# Altium PCB GPS_WS_NEO7M.PcbDoc
Units mm, origin at the board's own origin, x right, y up, seen from the top; angles counter-clockwise.
Board outline 40 x 32.5 mm, 4 copper layers (Top Layer, GND, PWR, Bottom Layer), stack 0.66 mm thick; 41 components, 31 nets, 145 pads, 335 vias.
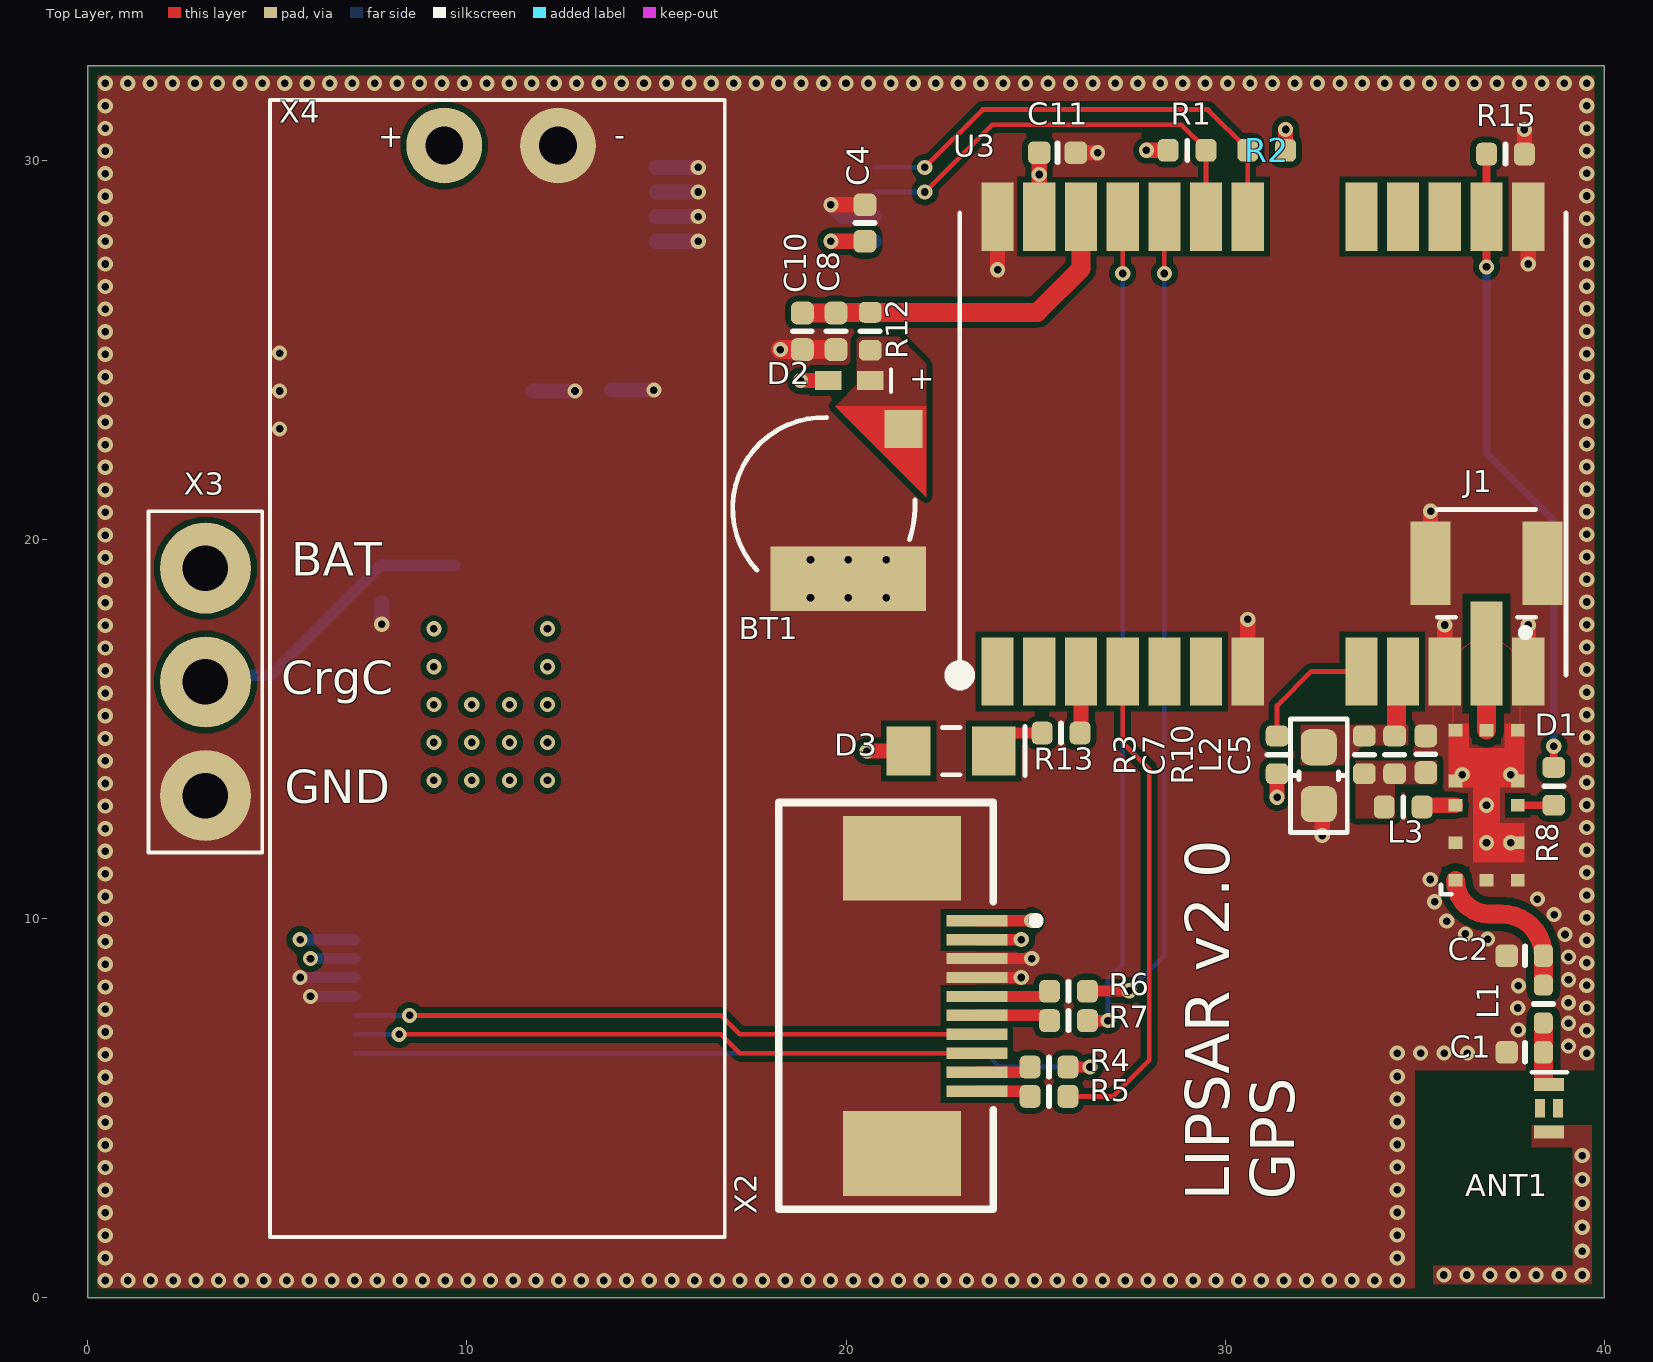
[diagram p0: Top Layer view]
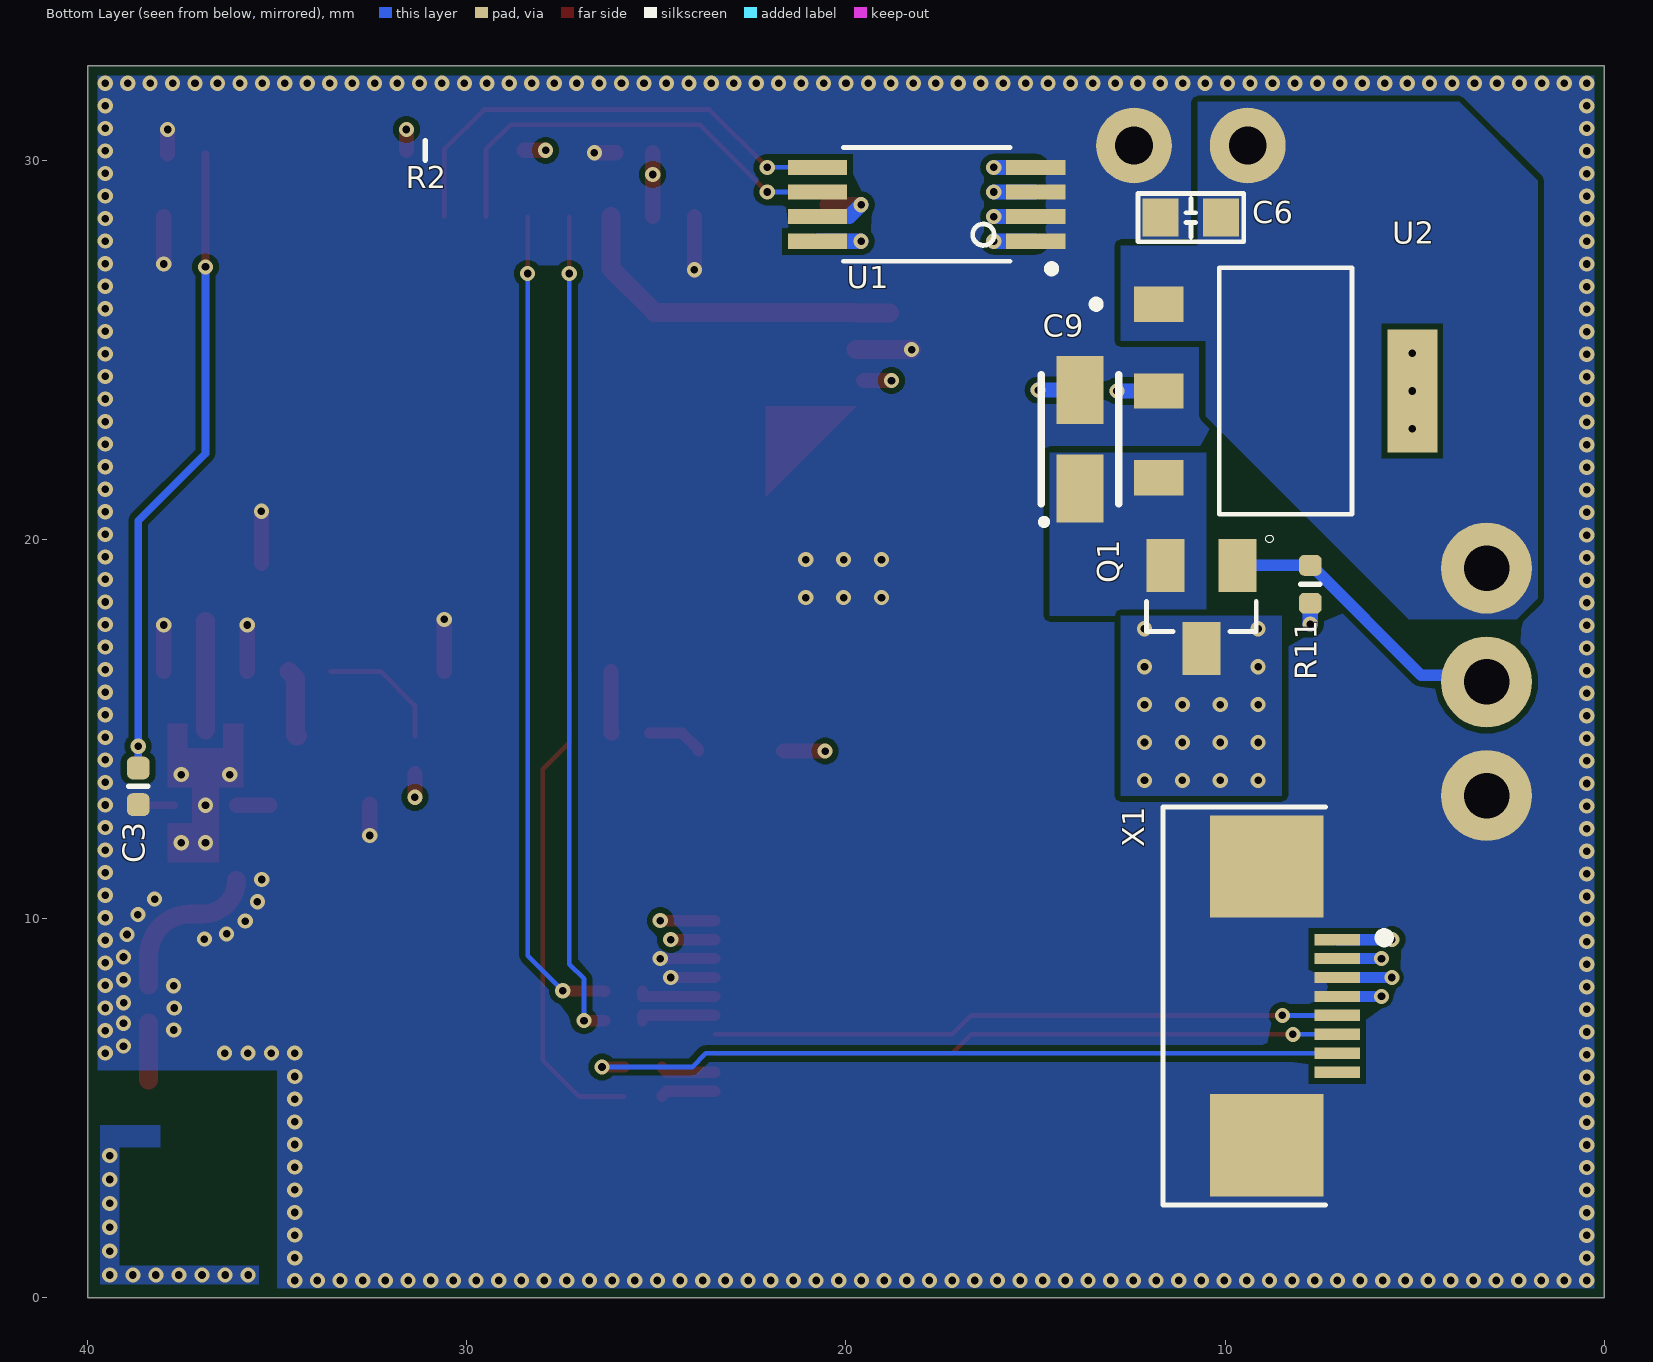
[diagram p1: Bottom Layer view, seen from below]
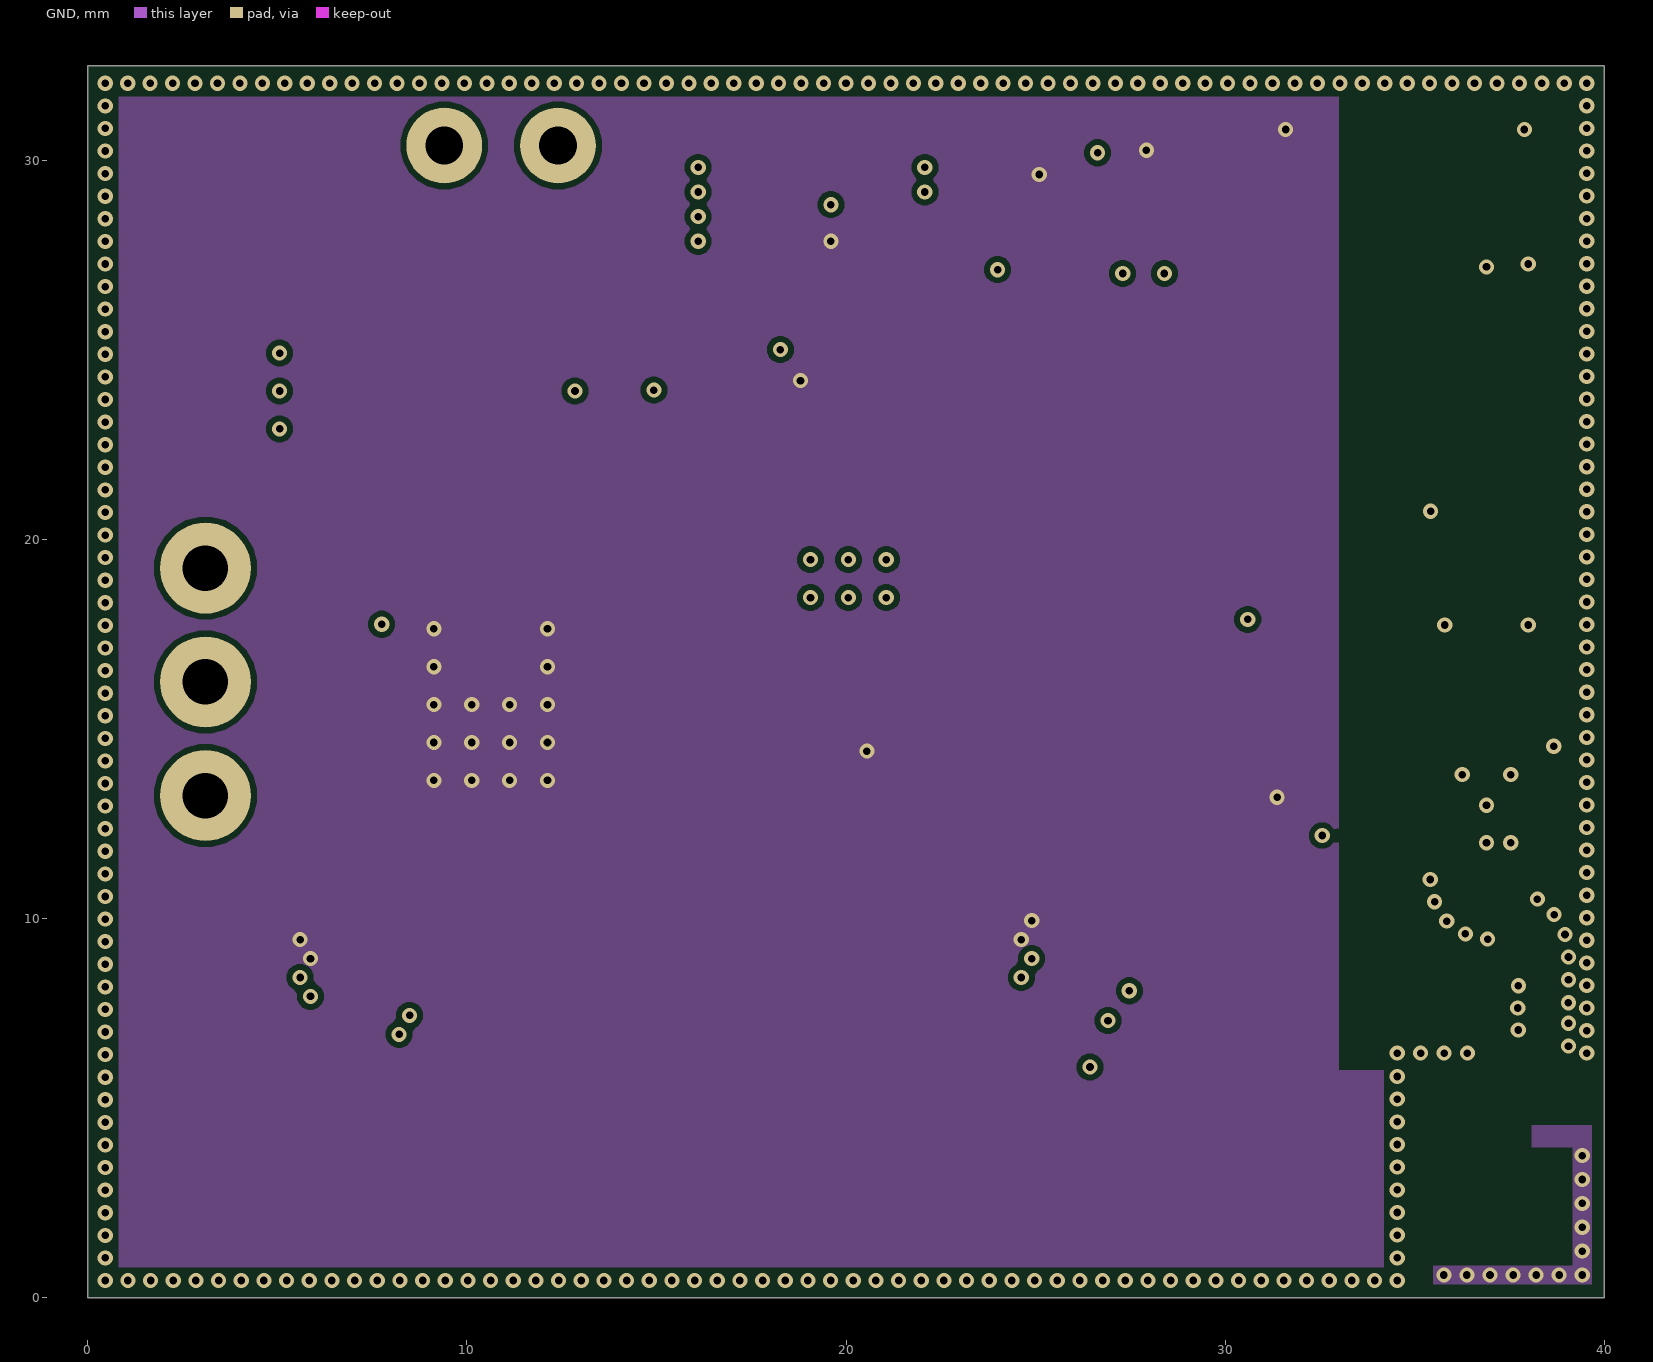
[diagram p2: GND]
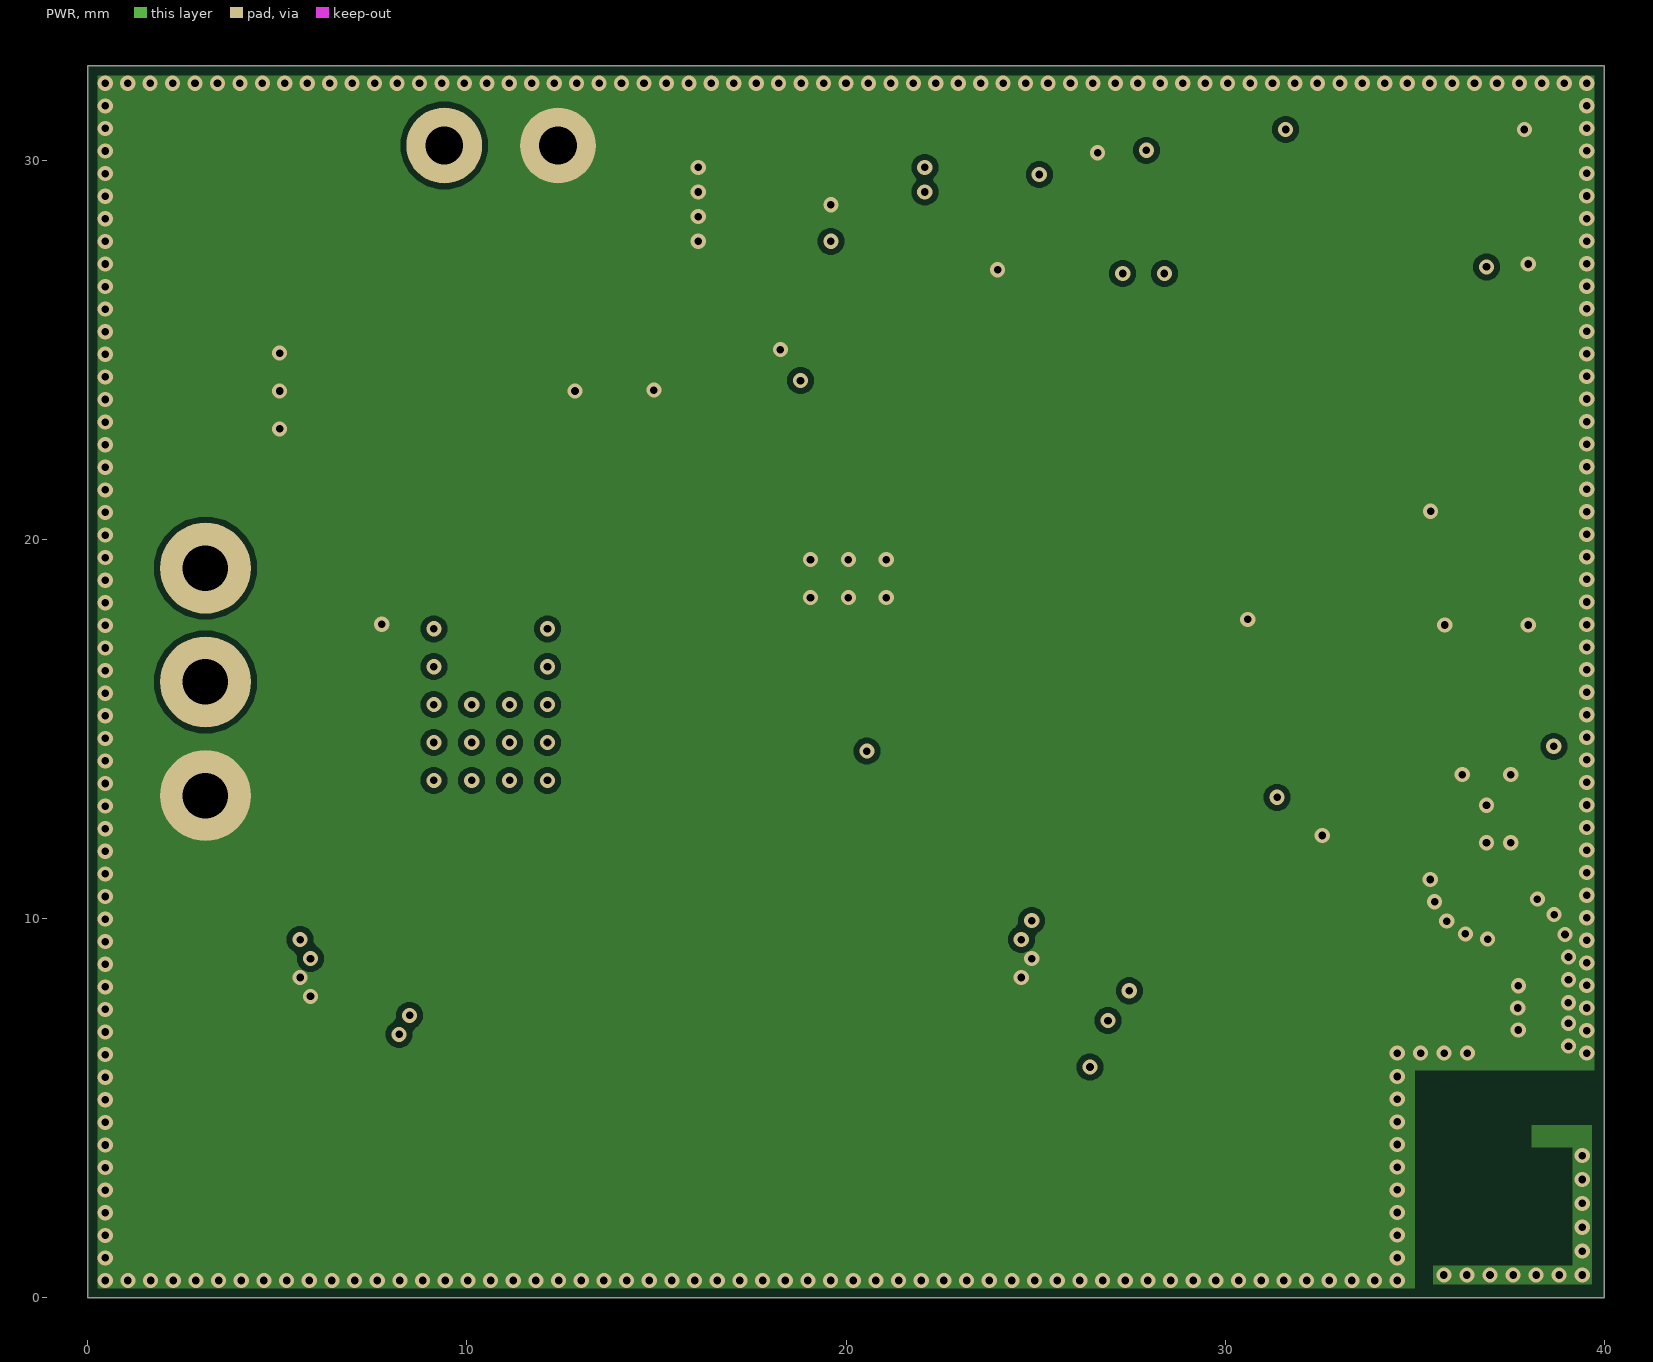
[diagram p3: PWR]
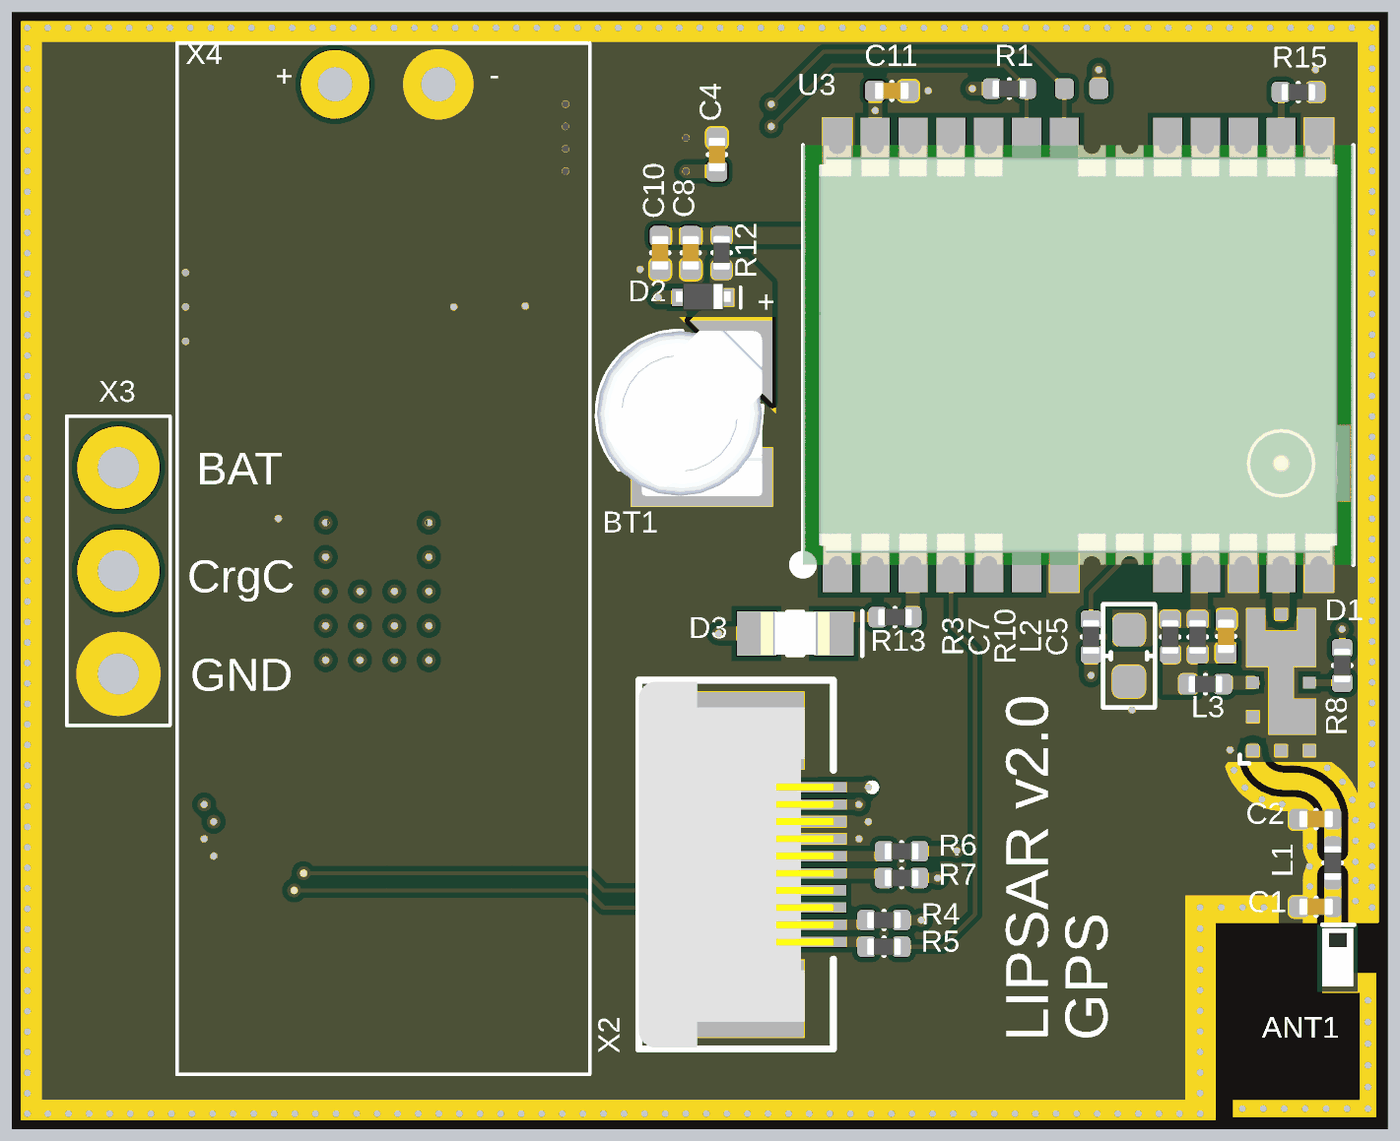
[diagram p4: 3D render of the assembled board from above, using the file's embedded part models]
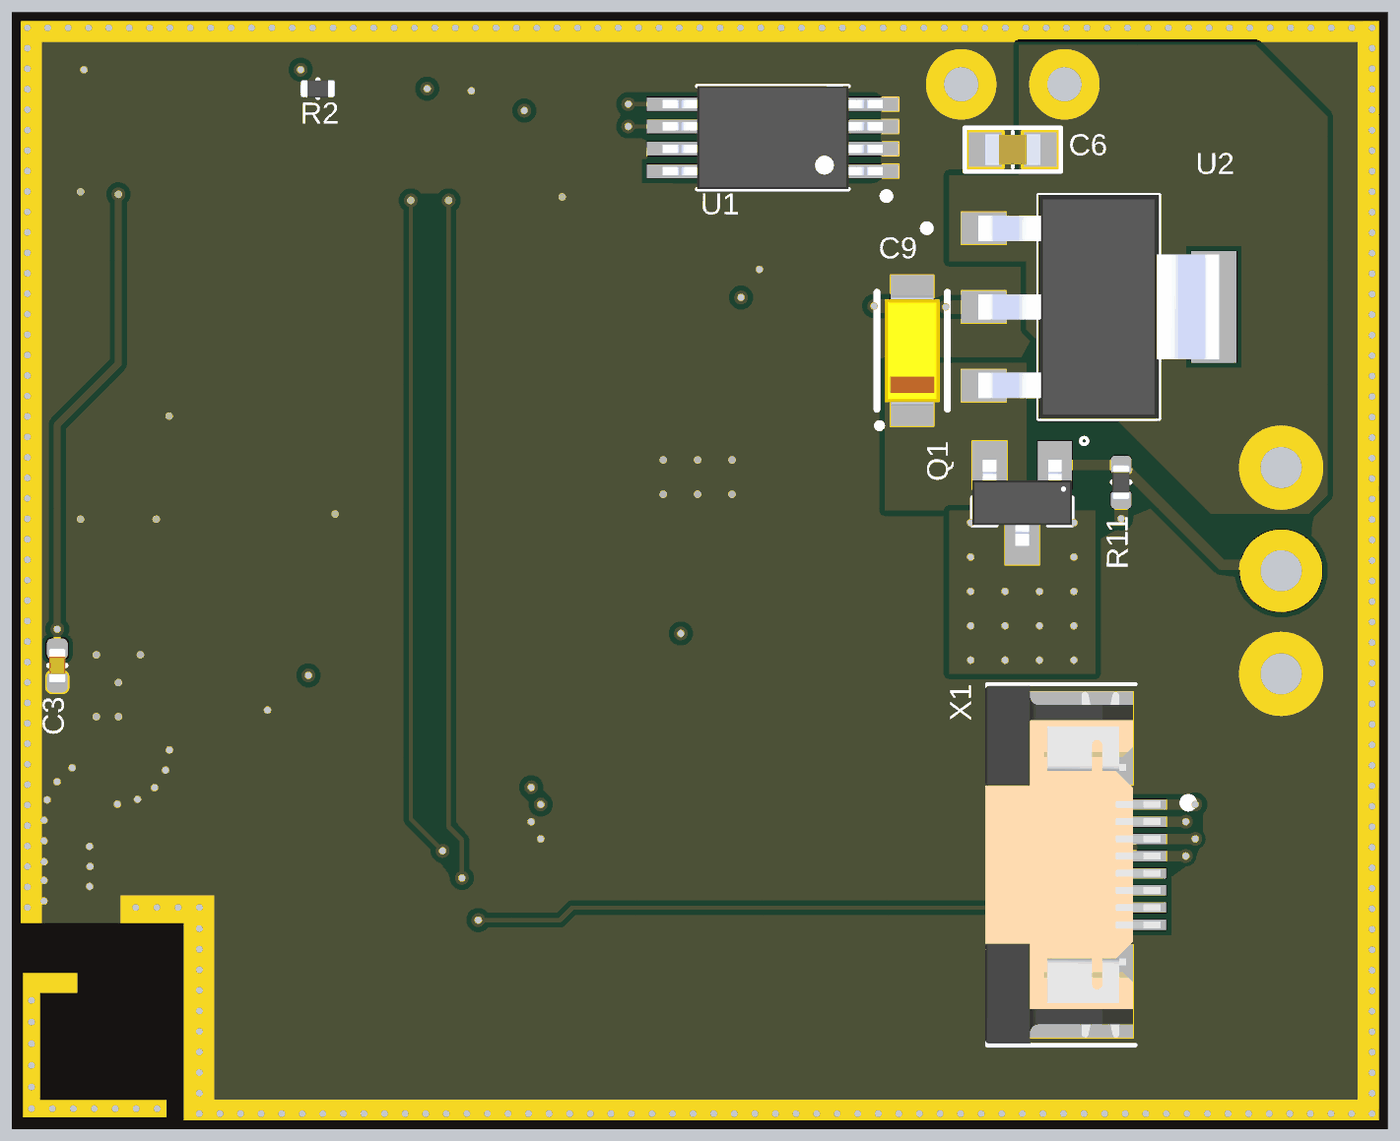
[diagram p5: 3D render of the assembled board from below, using the file's embedded part models]

## Layer stack, top to bottom
Top Solder: solder mask 0.0254, SM-001, Dk 4
Top Layer: signal copper 0.045
Dielectric 2: prepreg 0.125, FR4_HiTg170 PR, Dk 5.07
GND: signal copper 0.015
Dielectric 1: core 0.29, FR4 HiTg170, Dk 4.5
PWR: signal copper 0.015
Dielectric 5: prepreg 0.125, FR4_HiTg170 PR, Dk 5.07
Bottom Layer: signal copper 0.045
Bottom Solder: solder mask 0.0254, SM-001, Dk 4

## Board outline
0,0 0,32.5 40,32.5 40,0

## Design rules (kind name [scope] priority, off if disabled: settings)
AcuteAngle [All] p1: minimum=3.50000000000000E+0001 checktracksonly=FALSE
BoardOutlineClearance "BoardOutlineClearance 1" [Not OnSolderMask] p1: gap=0.25 ignorepadtopadclearanceinfootprint=FALSE except(0: Arc-SplitContinuation Track-SplitContinuation SMDPad-SplitContinuation THPad-SplitContinuation Via-SplitContinuation Fill-SplitContinuation Poly-SplitContinuation Region-SplitContinuation Text-SplitContinuation) // Milling
BoardOutlineClearance "BoardOutlineClearance 2" [All] p2 off: gap=0.4 ignorepadtopadclearanceinfootprint=FALSE except(0: Arc-SplitContinuation Track-SplitContinuation SMDPad-SplitContinuation THPad-SplitContinuation Via-SplitContinuation Fill-SplitContinuation Poly-SplitContinuation Region-SplitContinuation Text-SplitContinuation) // V-Cut
Clearance Clearance_Ant [InNet('NetD1_8') or InNet('NetC2_1') or InNet('NetANT1_1')] p1: gap=0.2 ignorepadtopadclearanceinfootprint=FALSE
Clearance "Clearance-2 1/2 Oz" [All] p2: gap=0.1 ignorepadtopadclearanceinfootprint=FALSE except(0.15: Arc-Fill Arc-Poly Track-Fill Track-Poly SMDPad-SMDPad SMDPad-Fill SMDPad-Poly THPad-Fill THPad-Poly Via-Fill Via-Poly Fill-Fill Fill-Poly Poly-Poly Poly-Region Poly-Text; 0.25: Arc-Hole Track-Hole SMDPad-Hole THPad-Hole Via-Hole Fill-Hole Poly-Hole Region-Hole Text-Hole) // Advance
DiffPairsRouting "DiffPairsRouting 1 Oz" [All] p1: maxlimit=0.254 minlimit=0.2 mostfreqgap=0.254 toplayer_minwidth=0.2 toplayer_maxwidth=0.381 toplayer_prefwidth=0.381 midlayer1_minwidth=0.2 midlayer1_maxwidth=0.381 midlayer1_prefwidth=0.381 midlayer2_minwidth=0.2 midlayer2_maxwidth=0.381 midlayer2_prefwidth=0.381 bottomlayer_minwidth=0.2 bottomlayer_maxwidth=0.381 bottomlayer_prefwidth=0.381 maxuncoupledlength=12.7
DiffPairsRouting "DiffPairsRouting 1/2 Oz" [All] p2: maxlimit=0.254 minlimit=0.1 mostfreqgap=0.254 toplayer_minwidth=0.1 toplayer_maxwidth=0.381 toplayer_prefwidth=0.381 midlayer1_minwidth=0.1 midlayer1_maxwidth=0.381 midlayer1_prefwidth=0.381 midlayer2_minwidth=0.1 midlayer2_maxwidth=0.381 midlayer2_prefwidth=0.381 bottomlayer_minwidth=0.1 bottomlayer_maxwidth=0.381 bottomlayer_prefwidth=0.381 maxuncoupledlength=12.7
HoleSize "Minimum HoleSize" [IsPad] p1: absolutevalues=TRUE maxlimit=5.9 minlimit=0.6 maxpercent=80.000 minpercent=20.000
HoleSize "Minimum HoleSize VIA 2" [IsVia] p2: absolutevalues=TRUE maxlimit=5.9 minlimit=0.2 maxpercent=80.000 minpercent=20.000 // Advance
HoleToHoleClearance Hole2HoleClearance [All] p1: gap=0.25 allowstackedmicrovias=FALSE
MinimumAnnularRing "Minimum AR VIA Standart" [IsVia] p1: minimumring=0.1
MinimumAnnularRing "Minimum AR PAD Standart" [IsPAD] p2: minimumring=0.15
MinimumSolderMaskSliver "SolderMask Bridge Advance" [All] p1: minsoldermaskwidth=0.1 // Mask LDI
PlaneClearance "PlaneClearance-2 1/2 Oz" [All] p1: clearance=0.15 // Advance
PlaneConnect "TermalConnect-2 1/2 Oz" [All] p1: planeconnectstyle=Direct reliefexpansion=0.15 reliefentries=4 reliefconductorwidth=0.15 reliefairgap=0.15 // Advance
PolygonConnect "PolygonConnect-2 1/2 Oz" [All] p1: connectstyle=Direct reliefconductorwidth=0.125 reliefentries=4 polygonreliefangle="90 Angle" airgapwidth=0.15 // Advance
RoutingCorners [All] p1 off: cornerstyle=45-Degree minsetback=2.54 maxsetback=2.54
RoutingVias [All] p1: holewidth=0.2 width=0.4 viastyle="Through Hole" minholewidth=0.2 minwidth=0.4 maxholewidth=5.9 maxwidth=6.4
SilkToSilkClearance Silk2SilkClearance [All] p1 off: silktosilkclearance=0.15
SilkToSolderMaskClearance Silk2SolderMaskClearance [IsPad] p1 off: minsilkscreentomaskgap=0.15 clearancetoexposedcopper=TRUE
SolderMaskExpansion SolderMaskExpansion_via [isvia] p1: expansion=0.102 istentingtop=TRUE
SolderMaskExpansion "SolderMaskExpansion LDI" [All] p2: expansion=0.025 istentingtop=FALSE // Advance
UnRoutedNet [All] p1: checkbadconnections=TRUE
Width Width_SPI [InNet('SPI1_CLK') or InNet('SPI1_CS_FLASH')or InNet('SPI1_CS_TFT')or InNet('SPI1_MISO')or InNet('SPI1_MOSI')] p1: maxlimit=0.16 minlimit=0.14 preferedwidth=0.16 toplayer_minwidth=0.16 midlayer1_maxwidth=0.14 midlayer1_prefwidth=0.14 midlayer2_maxwidth=0.14 midlayer2_prefwidth=0.14 bottomlayer_minwidth=0.16 minimp=50.000000 maximp=50.000000 favimp=50.000000
Width "Width 1/2 Oz" [All] p2: maxlimit=10 minlimit=0.1 preferedwidth=0.125 checkconnectedcopper=TRUE
20 further rules are at their usual default settings.

## Components (designator, comment, footprint, x,y, rotation, side; value= is the part's Value field where it differs from the comment)
ANT1 "ANT161575ST-1202A1" ANT161575ST1202A1 38.55,5 r270 top
BT1 "ML414H_IV01E" SEIKO_ML414H_IV01E 19.413,20.825 r0 top
C1 "STD_CAP" CAPC1005X55N#1 37.917,6.475 r180 top value="0.1 uF"
C2 "STD_CAP" CAPC1005X55N#2 37.917,9.025 r180 top value="0.1 uF"
C3 "STD_CAP" CAPC1005X55N#3 38.675,13.495 r270 bottom value="0.1 uF"
C4 "STD_CAP" CAPC1005X55N#3 20.5,28.358 r270 top value="0.1 uF"
C5 "STD_CAP" CAPC1005X55N#3 35.3,14.342 r90 top value="0.1 uF"
C6 "STD_CAP" CAPC1608X90N#1 10.9,28.5 r0 bottom value="0.47 uF"
C7 "STD_CAP" CAPC1608X90N#2 32.475,13.775 r270 top value="0.1 uF"
C8 "STD_CAP" CAPC1005X55N#3 19.738,25.5 r270 top value="100 pF"
C9 "STD_CAP_POL" CAPMP3216X180N 13.825,22.65 r90 bottom value="33 uF"
C10 "STD_CAP" CAPC1005X55N#3 18.85,25.5 r270 top value="100 pF"
C11 "STD_CAP" CAPC1005X55N#3 25.583,30.211 r180 top value="0.1 uF"
D1 "ALM-1712" ALM-1712 36.9,12.995 r90 top
D2 "RB520S30T1G" SOD523 20.088,24.2 r0 top
D3 "7012X1" LED_7012X1 22.775,14.425 r180 top
J1 "CONUFL001-SMD" LINX_CONUFL001-SMD 36.9,19.375 r0 top
L1 "STD_IND" RESC1005X40N#1 38.4,7.75 r90 top value="24 nH"
L2 "STD_IND" RESC1005X40N#2 34.475,14.325 r90 top value="24 nH"
L3 "STD_IND" RESC1005X40N#2 34.7,12.95 r180 top value="24 nH"
Q1 "IRLML6401" SOT23 10.625,18.225 r0 bottom
R1 "2904" RESC1005X40N#2 29,30.275 r0 top value="4.75 kOm"
R2 "2904" RESC1005X40N#2 31.1,30.275 r180 top value="4.75 kOm"
R3 "2904" RESC1005X40N#2 31.375,14.325 r270 top value="4.75 kOm"
R4 "2839" RESC1005X40N#2 25.356,6.087 r0 top value="1 kOm"
R5 "2839" RESC1005X40N#2 25.356,5.312 r0 top value="1 kOm"
R6 "2839" RESC1005X40N#2 25.869,8.087 r180 top value="1 kOm"
R7 "2839" RESC1005X40N#2 25.869,7.312 r0 top value="1 kOm"
R8 "2839" RESC1005X40N#2 38.675,13.495 r90 top value="1 kOm"
R10 "2839" RESC1005X40N#2 33.675,14.325 r270 top value="1 kOm"
R11 "2904" RESC1005X40N#2 7.75,18.825 r90 bottom value="4.75 kOm"
R12 "2839" RESC1005X40N#2 20.637,25.5 r90 top value="1 kOm"
R13 "2839" RESC1005X40N#2 25.675,14.9 r0 top value="1 kOm"
R15 "2839" RESC1005X40N#2 37.4,30.175 r0 top value="1 kOm"
U1 "M24C32-DRDW3TP/K" SOP65P640X120-8N 17.875,28.85 r0 bottom
U2 "LM" SOT229P700X180-4N 8.4,23.925 r180 bottom
U3 "NEO-7M-0" XCVR_NEO-7M-0 31,22.525 r90 top
X1 "FFC 8 pin" 68710814022 8.9,7.7 r270 bottom
X2 "FFC 10 pin" SAMTEC_ZF5S-10-01-T-WT 21.475,7.7 r270 top
X3 "Charge Connector" "POGO PINS" 3.1,16.25 r270 top
X4 "CON2" CON2 10.9,30.4 r0 top

## Footprints (in the part's own frame and the unit in brackets; to place one, negate y for a bottom-side part, rotate by r counter-clockwise, add the part's x,y. Pads: shape width x height; smd on the part's side, far side on the other; paste and mask are expansions set on the pad)
68710814022 [mm]
  rect 0.3x1.2 smd: 1(-1.75,1.86) 2(-1.25,1.86) 3(-0.75,1.86) 4(-0.25,1.86) 5(0.25,1.86) 6(0.75,1.86) 7(1.25,1.86) 8(1.75,1.86)
  rect 2.7x3 smd: S1(-3.68,0) S2(3.68,0)
  silkscreen extent -5.25,-2.74 5.25,3.23, body extent -5.2,-2.8 5.2,2.3, height 2.05
ALM-1712 [mm]
  rect 0.34x0.36 smd: 1(-1.98,0.82) 2(-1.98,0) 3(-1.98,-0.82) 4(-0.99,-0.82) 5(0,-0.82) 6(0.64,-0.82) 7(1.98,-0.82) 8(1.98,0) 9(1.98,0.82) 10(0.64,0.82) 11(0,0.82) 12(-0.99,0.82)
  Top Layer region: -1.5,-1 -1.5,0.35 0.47,0.35 0.47,1 2.15,1 2.15,0.475 1.5,0.475 1.5,-0.475 2.15,-0.475 2.15,-1 0.47,-1 0.47,-0.35 -0.48,-0.35 -0.48,-1
  silkscreen extent -2.35,0.92 -2.1,1.2, body extent -2.25,-1.1 2.25,1.1, height 1
ANT161575ST1202A1 [mm]
  rect 0.35x0.8 smd: 1(-0.625,0) 4(0.625,0)
  rect 0.5x0.26 smd: D1(0,0.235) D2(0,-0.235)
  silkscreen extent -0.95,-0.45 -0.95,0.48, body extent -0.85,-0.45 0.85,0.45, height 0.4
CAPC1005X55N#1 [mm] "Chip Capacitor, 2-Leads, Body 1,0x0,5mm, IPC Medium Density"
  rrect50% 0.5x0.6 smd: 1(-0.483,0)
  rrect50% 0.6x0.6 smd mask+0.05: 2(0.483,0)
  silkscreen extent 0,-0.25 0,0.25, body extent -0.5,-0.25 0.5,0.25, height 0.6
CAPC1005X55N#2 [mm] "Chip Capacitor, 2-Leads, Body 1,0x0,5mm, IPC Medium Density"
  rrect50% 0.5x0.6 smd mask+0.05: 1(-0.483,0)
  rrect50% 0.6x0.6 smd mask+0.05: 2(0.483,0)
  silkscreen extent 0,-0.25 0,0.25, body extent -0.5,-0.25 0.5,0.25, height 0.6
CAPC1005X55N#3 [mm] "Chip Capacitor, 2-Leads, Body 1,0x0,5mm, IPC Medium Density"
  rrect50% 0.6x0.6 smd mask+0.05: 1(-0.483,0) 2(0.483,0)
  silkscreen extent 0,-0.25 0,0.25, body extent -0.5,-0.25 0.5,0.25, height 0.6
CAPC1608X90N#1 [mm] "Chip Capacitor EIA 0603. METRIC 1608, 2-Leads, Body 1,6x0,8mm, IPC Medium Density"
  rect 0.95x1 smd mask+0.1: 1(-0.8,0) 2(0.8,0)
  silkscreen extent -1.4,-0.64 1.4,0.64, body extent -0.8,-0.45 0.8,0.45, height 0.8
CAPC1608X90N#2 [mm] "Chip Capacitor EIA 0603. METRIC 1608, 2-Leads, Body 1,6x0,8mm, IPC Medium Density"
  rrect50% 0.95x0.95 smd: 1(-0.75,0) 2(0.75,0)
  silkscreen extent -1.5,-0.75 1.5,0.75, body extent -0.8,-0.4 0.8,0.4, height 0.9
CAPMP3216X180N [mm] "Tantal Capacitor,Case A, METRIC 3216-18. 2-Leads, Body 3.2x1.6mm, IPC Medium Density"
  rect 1.8x1.25 smd: 1(-1.3,0) 2(1.3,0)
  silkscreen extent -2.26,-1.02 1.7,1.03, body extent -1.6,-0.8 1.6,0.8, height 1.8
CON2 [mm]
  round 2 hole 1: 1(-1.5,0) 2(1.5,0)
  silkscreen extent -6.1,-28.8 5.9,1.2, body extent -6.1,-28.8 5.9,1.2, height 4
LED_7012X1 [mm]
  rect 1.15x1.3 smd: A(1.125,0) C(-1.125,0)
  silkscreen extent -1.95,-0.65 0.23,0.65, body extent -1,-0.62 1,0.62, height 0.73
LINX_CONUFL001-SMD [mm]
  rect 0.85x1.05 smd: 1(0,-1.525)
  rect 1.05x2.2 smd: 2(-1.475,0) 3(1.475,0)
  silkscreen extent -1.3,-1.92 1.3,1.42, body extent -1.55,-1.5 1.55,1.5, height 1.3
"POGO PINS" [mm]
  round 2.4 hole 1.2: 1(-3,0) 2(0,0) 3(3,0)
  silkscreen extent -4.5,-1.5 4.5,1.5
RESC1005X40N#1 [mm] "Chip Resistor EIA 0402. METRIC 1005, 2-Leads, Body 1,0x0,5mm, IPC Medium Density"
  rrect50% 0.55x0.5 smd: 1(-0.5,0) 2(0.5,0)
  silkscreen extent 0,-0.25 0,0.25, body extent -0.5,-0.25 0.5,0.25, height 0.4
RESC1005X40N#2 [mm] "Chip Resistor EIA 0402. METRIC 1005, 2-Leads, Body 1,0x0,5mm, IPC Medium Density"
  rrect50% 0.55x0.6 smd: 1(-0.5,0) 2(0.5,0)
  silkscreen extent 0,-0.25 0,0.25, body extent -0.5,-0.25 0.5,0.25, height 0.4
SAMTEC_ZF5S-10-01-T-WT [mm]
  rect 0.3x1.6 smd: 1(-2.25,1.98) 2(-1.75,1.98) 3(-1.25,1.98) 4(-0.75,1.98) 5(-0.25,1.98) 6(0.25,1.98) 7(0.75,1.98) 8(1.25,1.98) 9(1.75,1.98) 10(2.25,1.98)
  rect 2.24x3.12 smd: S1(-3.897,0) S2(3.897,0)
  silkscreen extent -5.37,-3.25 5.37,3.64, body extent -5.33,-3.25 5.33,2.42, height 2.05
SEIKO_ML414H_IV01E [mm]
  rect 1x1 smd paste-1 mask+0: 1(2.1,2.1)
  rect 4.1x1.7 smd: 2(0.65,-1.85)
  Top Layer region: 2.7,0.3 0.3,2.7 2.7,2.7
  silkscreen extent -2.4,-1.63 2.41,2.4, body extent -2.4,-2.4 2.4,2.4, height 1.77
SOD523 [mm]
  rect 0.7x0.5 smd: 1(0.55,0) 2(-0.55,0)
  silkscreen extent 1.1,-0.3 1.1,0.3, body extent -0.79,-0.38 0.81,0.42, height 0.65
SOP65P640X120-8N [mm]
  rect 1.56x0.4 smd: 1(-2.88,0.975) 2(-2.88,0.325) 3(-2.88,-0.325) 4(-2.88,-0.975) 5(2.88,-0.975) 6(2.88,-0.325) 7(2.88,0.325) 8(2.88,0.975)
  silkscreen extent -3.4,-1.5 2.2,1.8, body extent -3.2,-1.5 3.2,1.5, height 1.2
SOT23 [mm]
  rect 1x1.4 smd: 1(-0.95,-1.1) 2(0.95,-1.1) 3(0,1.1)
  silkscreen extent -1.9,-1.9 1.45,0.65, body extent -1.45,-1.25 1.45,1.25, height 1.1
SOT229P700X180-4N [mm]
  rect 1.31x0.93 smd: 1(-3.345,2.29) 2(-3.345,0) 3(-3.345,-2.29)
  rect 1.31x3.24 smd: 4(3.345,0)
  silkscreen extent -5.1,-3.25 1.75,3.25, body extent -3.5,-3.25 3.5,3.25, height 1.8
XCVR_NEO-7M-0 [mm]
  rect 1.8x0.85 smd: 1(-6,7) 2(-6,5.9) 3(-6,4.8) 4(-6,3.7) 5(-6,2.6) 6(-6,1.5) 7(-6,0.4) 8(-6,-2.6) 9(-6,-3.7) 10(-6,-4.8) 11(-6,-5.9) 12(-6,-7) 13(6,-7) 14(6,-5.9) 15(6,-4.8) 16(6,-3.7) 17(6,-2.6) 18(6,0.4) 19(6,1.5) 20(6,2.6) 21(6,3.7) 22(6,4.8) 23(6,5.9) 24(6,7)
  silkscreen extent -6.3,-8 6.1,8.2, body extent -6.1,-8 6.1,8, height 2.6

## Part data
ANT1: Manufacturer=AMOTECH, ManufacturerPartnumber=AMAN1003030ST01, BOM="GPS Antenna    AMAN1003030ST01 AMOTECH", Footprint_Description=Custom, Human_Readable="GPS Antenna"
BT1: "Coin, 4.8mm 3 V Lithium Battery Rechargeable (Secondary) 1mAh", Manufacturer="Seiko Instruments", ManufacturerPartnumber="ML414H IV01E", Package="SOT-89 Seiko", Availability="In Stock", BOM="Перезаряжаемая батарейка    ML414H IV01E Seiko Instruments", Check_prices=https://www.snapeda.com/parts/ML414H%20IV01E/Seiko+Instruments/view-part/?ref=eda, Footprint_Description="SOT-89 Seiko", Human_Readable="Перезаряжаемая батарейка", MF="Seiko Instruments", MP="ML414H IV01E", Price=None, Purchase-URL="https://pricing.snapeda.com/search/part/ML414H IV01E/?ref=eda"
C1 C2 C3 C4 C5 C11: library part 5571, Dielectric=X7R, Manufacturer=muRata, ManufacturerPartnumber=GRM155R71H104KE14D, Temp_Range="-55°C to +125°C", Voltage_Range=50V, AuthorCreation_Comp=altium_lib_sch_p, AuthorModification_Comp=anosova, BOM="Конденсатор 0402 0.1 uF ±10% 50V X7R    GRM155R71H104KE14D muRata", Comp_Class_Name="Capacitors Chip SMD 0402", Comp_Class_Number=200003, Comp_Description="Capacitors 0402 0.10 uF ±10% 50V X7R", Comp_ID=200003-430, ComponentLink1Description=MANUFACTURER_URL, ComponentLink1URL=https://www.murata.com/~/media/webrenewal/support/library/catalog/products/capacitor/mlcc/c02e.ashx, Footprint_Description="Chip Capacitor EIA 0402. METRIC 1005, 2-Leads, Body 1,00x0,5mm, IPC Medium Density", HelpURL=\\corp1\RNDlibrary\_Library\Altium_lib\Datasheet\muRata\Chip_Monolithic_Ceramic_Capacitors\c02e.pdf, Human_Readable="Конденсатор 0402 0.1 uF ±10% 50V X7R", Lib_Description=Capacitor, Number_Base=5571, Precision=10%, TimeCreation_Comp="05.04.2018 11:21:57", TimeModification_Comp="18.11.2021 13:11:41", Verified=N
C6: library part 3938, Dielectric=X7R, Manufacturer=muRata, ManufacturerPartnumber=GRM188R71A474KA61D, Temp_Range="-55 to 125°C", Voltage_Range=10V, BOM="Конденсатор 0603 0.47 uF ±10% 10V X7R    GRM188R71A474KA61D muRata", Comp_Class_Name="Capacitors Chip SMD 0603", Comp_Class_Number=200004, Comp_Description="Capacitors 0603 0.47 uF ±10% 10V X7R", Comp_ID=200004-0111, ComponentLink1Description=MANUFACTURER_URL, ComponentLink1URL=http://www.murata.com/products/catalog/pdf/c02e.pdf, Footprint_Description="Chip Capacitor EIA 0603. METRIC 1608, 2-Leads, Body 1,6x0,8mm, IPC Medium Density", HelpURL=\\corp1\RNDlibrary\_Library\Altium_lib\Datasheet\muRata\Chip_Monolithic_Ceramic_Capacitors\Chip_Monolithic_Ceramic_Capacitors.pdf, Human_Readable="Конденсатор 0603 0.47 uF ±10% 10V X7R", Lib_Description=Capacitor, Number_Base=3938, Precision=±10%, TimeModification_Comp="06.12.2011 14:46:17"
C7: library part 6202, Dielectric=X7R, Manufacturer=TDK, ManufacturerPartnumber=C1608X7R1H104K, Temp_Range="-55°C to +125°C", Voltage_Range="50 V", AuthorCreation_Comp=anosova, AuthorModification_Comp=anosova, BOM="Capacitors 0603 0.1 uF ±10% 50V X7R    C1608X7R1H104K TDK", Comp_Class_Name="Capacitors Chip SMD 0603", Comp_Class_Number=200004, Comp_Description="Capacitors 0603 0.1 uF ±10% 50V X7R", Comp_ID=200004-122, ComponentLink1Description=MANUFACTURER_URL, ComponentLink1URL=https://media.digikey.com/pdf/Data%20Sheets/TDK%20PDFs/C_Series_GeneralAppl_B11.pdf, Footprint_Description="Chip Capacitor EIA 0603. METRIC 1608, 2-Leads, Body 1,60x0,8mm, IPC Medium Density", HelpURL=\\corp1\RNDlibrary\_Library\Altium_lib\Datasheet\TDK\Ceramic_Capacitors_C-Series\cseries.pdf, Human_Readable="Capacitors 0603 0.1 uF ±10% 50V X7R", Lib_Description=Capacitor, Number_Base=6202, Precision="± 10%", TimeCreation_Comp="29.10.2021 11:15:01", TimeModification_Comp="29.10.2021 11:29:43", Verified=N
C8 C10: library part 3764, Dielectric="C0G (NP0)", Manufacturer=muRata, ManufacturerPartnumber=GRM1555C1H101JA01D, Temp_Range="25 to 125°C", Voltage_Range=50V, AuthorModification_Comp=anosova, BOM="Конденсатор 0402 100 pF ±5% 50V  C0G (NP0)    GRM1555C1H101JA01D muRata", Comp_Class_Name="Capacitors Chip SMD 0402", Comp_Class_Number=200003, Comp_Description="Capacitors 0402 100 pF ±5% 50V  C0G (NP0)", Comp_ID=200003-0363, ComponentLink1Description=MANUFACTURER_URL, ComponentLink1URL=http://www.murata.com/products/catalog/pdf/c02e.pdf, Footprint_Description="Chip Capacitor EIA 0402. METRIC 1005, 2-Leads, Body 1,00x0,5mm, IPC Medium Density", HelpURL=\\corp1\RNDlibrary\_Library\Altium_lib\Datasheet\muRata\Chip_Monolithic_Ceramic_Capacitors\Chip_Monolithic_Ceramic_Capacitors.pdf, Human_Readable="Конденсатор 0402 100 pF ±5% 50V  C0G (NP0)", Lib_Description=Capacitor, Number_Base=3764, Precision=±5%, Price=0,0599999986588955, TimeModification_Comp="18.11.2021 12:51:58"
C9: library part 4456, Manufacturer=Kemet, ManufacturerPartnumber=T491A336K010AT, Temp_Range="-55°C to +125°C", Voltage_Range=10V, BOM="Конденсатор танталовый корпус A  METRIC 3216-18   33 uF 10% 10V    T491A336K010AT Kemet", Comp_Class_Name="Capacitors Tantal", Comp_Class_Number=2010, Comp_Description="Tantal Capacitor Case A  METRIC 3216-18   33 uF 10% 10V", Comp_ID=2010-0363, ComponentLink1Description=MANUFACTURER_URL, ComponentLink1URL=http://www.kemet.com/kemet/web/homepage/kechome.nsf/weben/9F2DE33590D9247E8525788D0059B1E1/$file/KEM_TC101_STD.pdf, Footprint_Description="Tantal Capacitor,Case A, METRIC 3216-18. 2-Leads, Body 3.2x1.6mm, IPC Medium Density", HelpURL=\\corp1\RNDlibrary\_Library\Altium_lib\Datasheet\KEMET\T491\KEM_TC101_STD.pdf, Human_Readable="Конденсатор танталовый корпус A  METRIC 3216-18   33 uF 10% 10V", Lib_Description="Polar Capacitor", Number_Base=4456, Precision=10%, TimeModification_Comp="08.12.2011 13:13:16"
D1: "Sot223/Pkg 1-Amp 3.3-Volt Low Drop Out Voltage Regulatator", Package="SOT-223 Seeed Technology", Availability="Not in stock", Check_prices=https://www.snapeda.com/parts/AMS1117-3.3/Advanced+Monolithic+Systems/view-part/?ref=eda, MF="Advanced Monolithic Systems", MP=AMS1117-3.3, Price=None, SnapEDA_Link=https://www.snapeda.com/parts/AMS1117-3.3/Advanced+Monolithic+Systems/view-part/?ref=snap
D2: "Diode Schottky 30 V 200mA (DC) Surface Mount SOD-523", Manufacturer="NXP Semiconductors", ManufacturerPartnumber=1PS79SB70, Package=None, BOM="Diode Schotky    1PS79SB70 NXP Semiconductors", Footprint_Description=SOD523, Human_Readable="Diode Schotky", MP=1PS79SB70, Price=None
D3: "Red - LED Indication - Discrete 1.7V 0805 (2012 Metric)", Package="0805 Visual Communications", Availability="In Stock", Check_prices=https://www.snapeda.com/parts/7012X1/Visual+Communications/view-part/?ref=eda, MF=VCC, MP=7012X1, Price=None, Purchase-URL=https://pricing.snapeda.com/search/part/7012X1/?ref=eda, SnapEDA_Link=https://www.snapeda.com/parts/7012X1/Visual+Communications/view-part/?ref=snap
J1: Manufacturer="TE Connectivity", ManufacturerPartnumber=1909763-1, Package=None, Availability="In Stock", BOM="UMCC разъем    1909763-1 TE Connectivity", Check_prices=https://www.snapeda.com/parts/CONUFL001-SMD/Linx/view-part/5842340/?ref=eda, Footprint_Description=UMCC, Human_Readable="UMCC разъем", Price=None, SnapEDA_Link=https://www.snapeda.com/parts/CONUFL001-SMD/Linx/view-part/5842340/?ref=snap
L1 L2 L3: library part 5343, Current_Range="280 mA", Manufacturer=muRata, ManufacturerPartnumber=LQW15AN24NG00, Temp_Range="-55°C to +125°C", AuthorCreation_Comp=altium_lib_sch_p, AuthorModification_Comp=altium_lib_sch_p, BOM="RF Inductor wire wound 0402 Size    LQW15AN24NG00 muRata", Comp_Class_Name="Inductances Chip", Comp_Class_Number=13010000, Comp_Description="RF Inductor wire wound 0402 Size", Comp_ID=13010000-030, ComponentLink1Description=MANUFACTURER_URL, HelpURL=\\Corp1\RNDlibrary\_Library\Altium_lib\Datasheet\muRata\Chip_Inductors\Chip_Inductors.o05e.pdf, Human_Readable="RF Inductor wire wound 0402 Size", Lib_Description="RF Inductor wire wound 0402 Size", Number_Base=5343, Precision=±2%, Price=0,239999994635582, TimeCreation_Comp="10.06.2015 18:13:48", TimeModification_Comp="10.06.2015 18:37:11", Verified=N
Q1: "P-Channel 12V 4.3A (Ta) 1.3W (Ta) Surface Mount Micro3â„¢/SOT-23", Manufacturer="International Rectifier", Availability=Unavailable, BOM="P-MOS    IRLML6401 International Rectifier", Check_prices=https://www.snapeda.com/parts/IRLML6401/International%20Rectifier/view-part/557178/?ref=eda, Footprint_Description="SOT-23 International Rectifier", Human_Readable=P-MOS, ManufacturerPartnumber=IRLML6401, Price=None, SnapEDA_Link=https://www.snapeda.com/parts/IRLML6401/International%20Rectifier/view-part/557178/?ref=snap
R1 R2 R3 R11: Manufacturer=Yageo, ManufacturerPartnumber=RC0402FR-074K75L, Power_Range=0.0625W, Temp_Range="-55 °C to +155 °C", BOM="Резистор 0402 1% E96 4,75 кОм    RC0402FR-074K75L Yageo", Comp_Class_Name="Resistors Chip SMD 0402 1% E96", Comp_Class_Number=11010201, Comp_Description="Resistor 0402 1% E96 4.75 kOm", Comp_ID=11010201-354, ComponentLink1Description=MANUFACTURER_URL, ComponentLink1URL=http://www.yageo.com/documents/recent/PYu-RC0402_51_RoHS_L_6.pdf, Footprint_Description="Chip Resistor EIA 0402. METRIC 1005, 2-Leads, Body 1,00x0,5mm, IPC Medium Density", HelpURL=\\corp1\RNDlibrary\_Library\Altium_lib\Datasheet\Yageo\RC0402\PYu-RC0402_51_RoHS_L_6.pdf, Human_Readable="Резистор 0402 1% E96 4,75 кОм", Lib_Description=Resistor, Number_Base=2904, Precision=1%, Price=0,00600000005215406, TimeModification_Comp="06.12.2011 13:34:56"
R4 R5 R6 R7 R8 R10 R12 R13 R15: Manufacturer=Yageo, ManufacturerPartnumber=RC0402FR-071K00L, Power_Range=0.0625W, Temp_Range="-55 °C to +155 °C", BOM="Резистор 0402 1% E96 1 кОм    RC0402FR-071K00L Yageo", Comp_Class_Name="Resistors Chip SMD 0402 1% E96", Comp_Class_Number=11010201, Comp_Description="Resistor 0402 1% E96 1 kOm", Comp_ID=11010201-289, ComponentLink1Description=MANUFACTURER_URL, ComponentLink1URL=http://www.yageo.com/documents/recent/PYu-RC0402_51_RoHS_L_6.pdf, Footprint_Description="Chip Resistor EIA 0402. METRIC 1005, 2-Leads, Body 1,00x0,5mm, IPC Medium Density", HelpURL=\\corp1\RNDlibrary\_Library\Altium_lib\Datasheet\Yageo\RC0402\PYu-RC0402_51_RoHS_L_6.pdf, Human_Readable="Резистор 0402 1% E96 1 кОм", Lib_Description=Resistor, Number_Base=2839, Precision=1%, Price=0,00600000005215406, TimeModification_Comp="06.12.2011 13:34:56"
U1: "M24C02-F Series 2 Kb (256 x 8) 5.5 V Serial IÂ²C bus EEPROMs - TSSOP-8", Manufacturer=STMicroelectronics, Package=None, Availability=Unavailable, BOM="EEPROM    M24C32-DRDW3TP/K STMicroelectronics", Footprint_Description=TSSOP8, Human_Readable=EEPROM, ManufacturerPartnumber=M24C32-DRDW3TP/K, Price=None
U2: "Sot223/Pkg 1-Amp 3.3-Volt Low Drop Out Voltage Regulatator", Manufacturer="Texas Instruments", ManufacturerPartnumber=LM3940IMP-3.3, Availability="Not in stock", BOM="LDO    LM3940IMP-3.3 Texas Instruments", Check_prices=https://www.snapeda.com/parts/AMS1117-3.3/Advanced+Monolithic+Systems/view-part/?ref=eda, Footprint_Description="SOT-223 Seeed Technology", Human_Readable=LDO, MF="Advanced Monolithic Systems", MP=AMS1117-3.3, Price=None, SnapEDA_Link=https://www.snapeda.com/parts/AMS1117-3.3/Advanced+Monolithic+Systems/view-part/?ref=snap
U3: "NEO-7 RF Receiver GLONASS, GNSS, GPS 1.575GHz -161dBm", Manufacturer="U-Blox America", Package="SMD-24 u-blox", Availability=Unavailable, BOM="NEO-7M-0 U-Blox America", Footprint_Description="SMD-24 u-blox", ManufacturerPartnumber=NEO-7M-0, MF="U-Blox America", MP=NEO-7M-0, SnapEDA_Link=https://www.snapeda.com/parts/NEO-7M-0/U-Blox%20America%20Inc./view-part/48598/?ref=snap
X1 X2: "FFC connector 8 pin"
X3: "Выводы под плату зарядки"
X4: "Коннектор двухконтактный", Manufacturer=Robiton, ManufacturerPartnumber=LP401230, BOM="Аккумулятор литий ионный    LP401230 Robiton", Footprint_Description=Custom, Human_Readable="Аккумулятор литий ионный"

## Via types
v1: diameter 0.4, hole 0.2, Top Layer to Bottom Layer, tented both sides, 335 vias

## Nets (pads, with @x,y where several pads share a name; then routed paths per layer and width w, separated by ;. In a path a pad name is that pad's centre, name@x,y a point inside that pad or via, vN(x,y) a via of type N, cw(c..) or ccw(c..) an arc to the next point about the centre after c; other vN are vias at no path point)
3V3: C4.2 C11.2 D2.2 D3.A Q1.3 R1.1 R2.1 R3.2 U1.8 U3.23 X1.1 X1.2 X2.1 X2.2 | length 12.6
  Top Layer w0.3: X2.2 v1(24.625,9.45) ; X2.1 v1(24.9,9.95)
  Top Layer w0.4: v1(18.8,24.2) D2.2 ; v1(19.6,27.875) C4.2 ; v1(20.55,14.425) D3.A ; U3.23 C11.2 ; v1(27.925,30.275) R1.1 ; v1(31.375,13.205) R3.2@31.375,13.83 ; R2.1 v1(31.6,30.825)
  Bottom Layer w0.3: v1(5.595,9.45) X1.1 ; v1(5.87,8.95) X1.2
  Bottom Layer w0.4: v1(19.6,27.875) U1.8
  other v1: 9.125,13.65 10.125,13.65 11.125,13.65 12.125,13.65 9.125,14.65 10.125,14.65 11.125,14.65 12.125,14.65 9.125,15.65 10.125,15.65 11.125,15.65 12.125,15.65 9.125,16.65 12.125,16.65 9.125,17.65 12.125,17.65 25.1,29.637
ANT_ON: C3.1 R8.2 R15.1 U3.14 | length 17.5
  Top Layer w0.2: v1(36.9,27.2) U3.14 R15.1 ; R8.2 v1(38.675,14.55)
  Bottom Layer w0.2: v1(36.9,27.2) 36.9,22.275 38.675,20.5 v1(38.675,14.55) C3.1
Charge_Bat: Q1.1 R11.2 X3.2 | length 7.8
  Bottom Layer w0.3: X3.2 3.275,16.425 4.825,16.425 7.725,19.325 R11.2 Q1.1
FEED: ANT1.4
  other v1: 35.775,0.6 36.383,0.6 36.992,0.6 37.6,0.6 38.208,0.6 38.817,0.6 39.425,0.6 39.425,1.23 39.425,1.86 39.425,2.49 39.425,3.12 39.425,3.75
GND: BT1.2 C1.2 C2.2 C3.2 C4.1 C5.2 C6.2 C7.2 C8.2 C9.2 C10.2 C11.1 D1.2 D1.3 D1.4 D1.6 D1.7 D1.9 D1.10 D1.12 J1.2 J1.3 R11.1 R15.2 U1.1 U1.2 U1.3 U1.4 U1.7 U2.2 U2.4 U3.7 U3.10 U3.12 U3.13 U3.24 X1.3 X1.4 X1.S1 X1.S2 X2.3 X2.4 X2.S1 X2.S2 X3.3 X4.2 | length 26
  Top Layer w0.3: X2.4 v1(24.625,8.45) ; X2.3 v1(24.9,8.95)
  Top Layer w0.4: v1(19.6,28.84) C4.1 ; v1(24,27.125) U3.24 ; C11.1 v1(26.639,30.211) ; U3.7 v1(30.6,17.9) ; v1(32.565,12.196) C7.2@32.565,13.025 ; J1.2 v1(35.425,20.75) ; U3.10 v1(35.8,17.75) ; R15.2 v1(37.9,30.825) ; U3.12 v1(38,17.75) ; v1(38,27.275) U3.13
  Top Layer w0.5: v1(18.267,25.017) C10.2 C8.2
  Bottom Layer w0.3: v1(5.595,8.45) X1.3 ; v1(5.87,7.95) X1.4
  Bottom Layer w0.4: v1(7.75,17.77) R11.1 ; U2.2 v1(12.85,23.925) ; C9.2 v1(14.93,23.95) ; U1.1 v1(16.1,27.875) ; U1.2 v1(16.1,28.525) ; U1.3 v1(16.1,29.175) ; U1.4 v1(16.1,29.825) ; v1(19.6,28.84) 19.915,28.525 U1.7
  other v1: 0.455,0.455 1.053,0.455 1.651,0.455 2.249,0.455 2.847,0.455 3.445,0.455 4.044,0.455 4.642,0.455 5.24,0.455 5.838,0.455 6.436,0.455 7.034,0.455 7.632,0.455 8.23,0.455 8.828,0.455 9.426,0.455 10.024,0.455 10.622,0.455 11.22,0.455 11.818,0.455 12.417,0.455 13.015,0.455 13.613,0.455 14.211,0.455 14.809,0.455 15.407,0.455 16.005,0.455 16.603,0.455 17.201,0.455 17.799,0.455 18.397,0.455 18.995,0.455 19.593,0.455 20.191,0.455 20.789,0.455 21.388,0.455 21.986,0.455 22.584,0.455 23.182,0.455 23.78,0.455 24.378,0.455 24.976,0.455 25.574,0.455 26.172,0.455 26.77,0.455 27.368,0.455 27.966,0.455 28.564,0.455 29.162,0.455 29.761,0.455 30.359,0.455 30.957,0.455 31.555,0.455 32.153,0.455 32.751,0.455 33.349,0.455 33.947,0.455 34.545,0.455 0.455,1.051 34.545,1.053 0.455,1.647 34.545,1.651 0.455,2.243 34.545,2.249 0.455,2.839 34.545,2.847 0.455,3.435 34.545,3.445 0.455,4.031 34.545,4.044 0.455,4.627 34.545,4.642 0.455,5.223 34.545,5.24 0.455,5.819 34.545,5.838 0.455,6.415 34.545,6.455 35.162,6.455 35.78,6.455 36.397,6.455 39.545,6.455 39.063,6.641 0.455,7.011 37.737,7.065 39.545,7.05 39.063,7.241 0.455,7.607 37.723,7.646 39.545,7.645 39.061,7.785 0.455,8.203 37.741,8.233 39.545,8.241 39.063,8.392 0.455,8.799 39.545,8.836 39.063,8.992 0.455,9.395 39.545,9.431 36.928,9.462 38.971,9.584 36.344,9.599 35.85,9.939 0.455,9.991 39.545,10.026 38.683,10.111 35.53,10.447 38.242,10.518 0.455,10.588 39.545,10.621 35.417,11.036 0.455,11.184 39.545,11.216 0.455,11.78 39.545,11.811 36.9,12.005 37.54,12.005 0.455,12.376 39.545,12.406 0.455,12.972 36.9,12.995 39.545,13.001 0.455,13.568 39.545,13.597 36.26,13.805 37.54,13.805 0.455,14.164 39.545,14.192 0.455,14.76 39.545,14.787 0.455,15.356 39.545,15.382 0.455,15.952 39.545,15.977 0.455,16.548 39.545,16.572 0.455,17.144 39.545,17.167 0.455,17.74 39.545,17.762 0.455,18.336 39.545,18.357 19.062,18.475 20.063,18.475 21.063,18.475 0.455,18.932 39.545,18.953 19.062,19.475 20.063,19.475 21.063,19.475 0.455,19.528 39.545,19.548 0.455,20.124 39.545,20.143 0.455,20.72 39.545,20.738 0.455,21.316 39.545,21.333 0.455,21.912 39.545,21.928 0.455,22.508 39.545,22.523 5.055,22.925 0.455,23.104 39.545,23.118 0.455,23.7 39.545,23.713 5.055,23.925 0.455,24.296 39.545,24.309 0.455,24.892 39.545,24.904 5.055,24.925 0.455,25.488 39.545,25.499 0.455,26.084 39.545,26.094 0.455,26.681 39.545,26.689 0.455,27.277 39.545,27.284 0.455,27.873 39.545,27.879 0.455,28.469 39.545,28.474 0.455,29.065 39.545,29.07 0.455,29.661 39.545,29.665 0.455,30.257 39.545,30.26 0.455,30.853 39.545,30.855 0.455,31.449 39.545,31.45 0.455,32.045 1.047,32.045 1.639,32.045 2.232,32.045 2.824,32.045 3.416,32.045 4.009,32.045 4.601,32.045 5.193,32.045 5.785,32.045 6.378,32.045 6.97,32.045 7.562,32.045 8.154,32.045 8.747,32.045 9.339,32.045 9.931,32.045 10.523,32.045 11.116,32.045 11.708,32.045 12.3,32.045 12.893,32.045 13.485,32.045 14.077,32.045 14.669,32.045 15.262,32.045 15.854,32.045 16.446,32.045 17.038,32.045 17.631,32.045 18.223,32.045 18.815,32.045 19.408,32.045 20,32.045 20.592,32.045 21.184,32.045 21.777,32.045 22.369,32.045 22.961,32.045 23.553,32.045 24.146,32.045 24.738,32.045 25.33,32.045 25.922,32.045 26.515,32.045 27.107,32.045 27.699,32.045 28.292,32.045 28.884,32.045 29.476,32.045 30.068,32.045 30.661,32.045 31.253,32.045 31.845,32.045 32.437,32.045 33.03,32.045 33.622,32.045 34.214,32.045 34.807,32.045 35.399,32.045 35.991,32.045 36.583,32.045 37.176,32.045 37.768,32.045 38.36,32.045 38.952,32.045 39.545,32.045
INT_GPS: R5.2 U3.4 | length 13.1
  Top Layer w0.125: R5.2 27.052,5.312 28,6.261 28,13.95 27.3,14.65 U3.4
INT_PULSE: R4.2 X1.7 | length 20.1
  Top Layer w0.3: R4.2 v1(26.437,6.087)
  Bottom Layer w0.125: X1.7 23.7,6.45 24.063,6.087 v1(26.437,6.087)
MCU_SCL: X1.6 X2.8 | length 16.6
  Top Layer w0.125: v1(8.21,6.95) 16.7,6.95 17.2,6.45 X2.8
  Bottom Layer w0.125: X1.6 v1(8.21,6.95)
MCU_SDA: X1.5 X2.7 | length 16.6
  Top Layer w0.125: v1(8.485,7.45) 16.7,7.45 17.2,6.95 X2.7
  Bottom Layer w0.125: X1.5 v1(8.485,7.45)
NetANT1_1: ANT1.1 C1.1 L1.1 | length 1.5
  Top Layer w0.5: ANT1.1@38.4,5.75 C1.1 L1.1
NetBT1_1: BT1.1 D2.1 R12.1
NetC2_1: C2.1 D1.1 L1.2 | length 4.2
  Top Layer w0.5: D1.1 ccw(c36.97,11.015) 36.97,10.125 37.3,10.125 cw(c37.3,9.025) C2.1 L1.2
NetC5_1: C5.1 L2.1 L3.2 R10.2
NetC9_1: C9.1 Q1.2 U2.3
NetD1_5: D1.5 R8.1 | length 1
  Top Layer w0.2: D1.5 R8.1
NetD1_8: D1.8 J1.1 U3.11 | length 2.9
  Top Layer w0.5: D1.8 U3.11 J1.1
NetD1_11: D1.11 L3.1 | length 0.9
  Top Layer w0.3: L3.1 L3.1@35.2,12.995
  Top Layer w0.4: L3.1@35.2,12.995 D1.11
NetD3_C: D3.C R13.1 | length 1.5
  Top Layer w0.3: D3.C 23.9,14.475 24.325,14.9 R13.1
NetR4_1: R4.1 X2.9 | length 1.5
  Top Layer w0.3: X2.9 24.731,5.95 24.856,6.075 R4.1
NetR5_1: R5.1 X2.10 | length 1.5
  Top Layer w0.3: X2.10 24.731,5.45 24.856,5.325 R5.1
NetR6_2: R6.2 X2.5 | length 2.1
  Top Layer w0.3: X2.5 25.369,7.95 R6.2
NetR7_1: R7.1 X2.6 | length 2.1
  Top Layer w0.3: X2.6 25.369,7.45 R7.1
NetR13_2: R13.2 U3.3 | length 1.6
  Top Layer w0.4: R13.2 26.2,14.9 U3.3
RST_N: R3.1 U3.8 | length 3.4
  Top Layer w0.125: R3.1 31.375,15.625 32.275,16.525 U3.8
RXD1_MCU: R6.1 U3.20 | length 21.9
  Top Layer w0.125: v1(28.4,27.025) U3.20
  Top Layer w0.3: R6.1 26.376,8.094 27.469,8.094 v1(27.475,8.1)
  Bottom Layer w0.125: v1(27.475,8.1) 28.4,9.025 v1(28.4,27.025)
SCL_GPS: R1.2 U1.6 U3.19 | length 11.5
  Top Layer w0.125: v1(22.078,29.175) 23.853,30.95 28.85,30.95 29.5,30.3 R1.2 U3.19
  Bottom Layer w0.125: U1.6 v1(22.078,29.175)
SDA_GPS: R2.2 U1.5 U3.18 | length 12.7
  Top Layer w0.125: v1(22.078,29.825) 23.603,31.35 29.55,31.35 30.6,30.3 R2.2 U3.18
  Bottom Layer w0.125: U1.5 v1(22.078,29.825) v1@22.1,29.825
TXD1_MCU: R7.2 U3.21 | length 21.9
  Top Layer w0.125: v1(27.3,27.025) U3.21
  Top Layer w0.3: R7.2 v1(26.913,7.312)
  Bottom Layer w0.125: v1(26.913,7.312) 26.913,8.413 27.3,8.8 v1(27.3,27.025)
Vbat: C6.1 U2.1 X3.1 X4.1
VBCKP: C8.1 C10.1 R12.2 U3.22 | length 9.2
  Top Layer w0.5: C10.1 C8.1 19.746,25.991 20.629,25.991 R12.2 25.05,26 26.2,27.15 U3.22
VCC_RF: C7.1 L2.2 R10.1 U3.9 | length 1.8
  Top Layer w0.5: L2.2 34.5,14.825 34.525,14.85 34.525,16.35 U3.9
pads on no net: ANT1.D1 ANT1.D2 U3.1 U3.2 U3.5 U3.6 U3.15 U3.16 U3.17 X1.8

## Polygon pours and split planes (outlines as drawn)
GND on Bottom Layer "GND_L04_P048" (solid, remove dead copper, pour order 48): 0,32.5 40,32.5 40,0 0,0
Vbat on Bottom Layer "Bottom Layer-Vbat" (solid, pour order 10): 1.75,18.45 2.3,17.9 5.15,17.9 10.513,23.263 10.513,25.25 12.75,25.25 12.75,27.762 10.725,27.762 10.725,31.55 3.825,31.55 1.75,29.475
FEED on Bottom Layer "FEED_L04_P050" (solid, pour order 50): 38.1,4.55 39.675,4.55 39.675,0.35 35.5,0.35 35.5,0.85 39.175,0.85 39.175,3.975 38.1,3.975
NetC9_1 on Bottom Layer "NETC9_1_L04_P012" (solid, pour order 12): 10.5,22.3 10.5,18 14.625,18 14.625,22.3
3V3 on Bottom Layer "3V3_L04_P011" (solid, pour order 11): 8.5,18 12.75,18 12.75,13.25 8.5,13.25
GND on Top Layer "GND_L01_P053" (solid, pour order 53): 0,32.5 40,32.5 40,0 0,0
FEED on Top Layer "FEED_L01_P052" (solid, pour order 52): 38.1,4.55 39.675,4.55 39.675,0.35 35.5,0.35 35.5,0.85 39.175,0.85 39.175,3.975 38.1,3.975
GND on Top Layer "Top Layer-GND" (solid, pour order 57): 37.118,17.366 37.21,17.327 37.34,17.273 37.423,17.218 37.508,17.133 37.593,17.048 37.648,16.965 37.714,16.808 37.741,16.743 37.76,16.645 37.76,16.585 37.772,16.525 37.772,14.975 37.76,14.915 37.76,14.855 37.741,14.757 37.702,14.665 37.648,14.535 37.593,14.452 37.508,14.367 37.423,14.282 37.34,14.227 37.183,14.161 37.118,14.134 37.02,14.115 36.78,14.115 36.682,14.134 36.59,14.173 36.46,14.227 36.377,14.282 36.292,14.367 36.207,14.452 36.152,14.535 36.086,14.692 36.059,14.757 36.04,14.855 36.04,14.915 36.028,14.975 36.028,16.525 36.04,16.585 36.04,16.645 36.059,16.743 36.098,16.835 36.152,16.965 36.207,17.048 36.292,17.133 36.377,17.218 36.46,17.273 36.617,17.339 36.682,17.366 36.78,17.385 37.02,17.385
NetC5_1 on Top Layer "NETC5_1_L01_P014" (solid, pour order 14): 33.45,12.65 33.45,14.167 35.6,14.167 35.6,13.55 34.475,13.55 34.475,12.65
VCC_RF on Top Layer "VCC_RF_L01_P035" (solid, pour order 35): 32,14.05 33.126,14.05 33.651,14.575 34.838,14.575 34.838,15.125 32,15.125
GND on Top Layer "GND_L01_P056" (solid, pour order 56): 37.9,12.515 37.25,12.515 37.25,13.465 37.9,13.465 37.9,15.145 37.375,15.145 37.375,14.495 36.425,14.495 36.425,15.145 35.9,15.145 35.9,13.465 36.55,13.465 36.55,12.175 35.9,12.175 35.9,11.495 36.72,11.495 36.72,10.845 37.9,10.845 36.72,10.845 37.9,10.845
NetBT1_1 on Top Layer "NETBT1_1_L01_P044" (solid, pour order 44): 19.713,23.525 20.287,24.1 20.287,25.283 20.363,25.358 21.392,25.358 22.113,24.637 22.113,21.125
3V3 on GND "3V3_L02_P020" (solid, pour order 20): 0.806,31.695 34.183,31.695 34.183,0.805 0.806,0.805
FEED on GND "FEED_L02_P015" (solid, pour order 15): 38.1,4.55 39.675,4.55 39.675,0.35 35.5,0.35 35.5,0.85 39.175,0.85 39.175,3.975 38.1,3.975
GND on PWR "GND_L03_P019" (solid, pour order 19): 0,32.5 40,32.5 40,0 0,0
FEED on PWR "FEED_L03_P037" (solid, pour order 37): 38.1,4.55 39.675,4.55 39.675,0.35 35.5,0.35 35.5,0.85 39.175,0.85 39.175,3.975 38.1,3.975
no net on Top Solder "NONET_L01_P061" (solid): 35,0 0,0 0,32.5 40,32.5 40,6 39.131,6 39.131,31.631 0.87,31.631 0.87,0.869 34.119,0.869 34.119,6.805 36.839,6.805 36.839,6 35,6
no net on Top Solder "NONET_L01_P-001" (solid): 35,6 37.95,6 37.95,4 39.131,4 39.131,6 40,6 40,0 35,0
no net on Top Solder (solid, pour order 58): 35.24,10.694 38.356,10.694 38.638,10.477 38.692,10.417 38.752,10.363 38.969,10.081 39.004,10.009 39.049,9.942 39.185,9.614 39.201,9.534 39.227,9.458 39.273,9.106 39.271,9.065 39.279,9.025 39.272,8.991 39.272,8.25 39.26,8.19 39.26,8.13 39.241,8.032 39.202,7.94 39.148,7.81 39.109,7.75 39.148,7.69 39.214,7.533 39.241,7.468 39.26,7.37 39.26,7.31 39.272,7.25 39.272,6.475 39.273,5.951 37.528,5.951 37.528,6.475 37.528,7.25 37.54,7.31 37.54,7.37 37.559,7.468 37.598,7.56 37.652,7.69 37.691,7.75 37.652,7.81 37.586,7.967 37.559,8.032 37.54,8.13 37.54,8.19 37.528,8.25 37.528,8.98 37.515,9.083 37.492,9.136 37.457,9.182 37.411,9.217 37.358,9.24 37.255,9.253 36.995,9.253 36.97,9.248 36.93,9.256 36.889,9.254 36.592,9.293 36.515,9.319 36.436,9.334 36.159,9.449 36.092,9.494 36.02,9.53 35.781,9.712 35.728,9.773 35.667,9.826 35.485,10.065 35.449,10.137 35.404,10.204 35.289,10.481 35.274,10.56 35.248,10.637
no net on Bottom Solder "NONET_L01_P-001" (solid): 35,6 37.95,6 39.131,6 40,6 40,0 35,0
no net on Bottom Solder "NONET_L01_P061" (solid, pour order 61): 35,0 0,0 0,32.5 40,32.5 40,6 39.131,6 39.131,31.631 0.87,31.631 0.87,0.869 34.119,0.869 34.119,6.805 36.839,6.805 36.839,6 35,6

## Other copper
Top Layer:
  pour cut-out: 38.439,7.7 38.536,7.68 38.566,7.668 38.608,7.651 38.691,7.595 38.718,7.568 38.745,7.541 38.801,7.458 38.813,7.428 38.83,7.386 38.85,7.289 38.85,7.269 38.854,7.25 38.854,6.475 38.854,5.75 38.85,5.731 38.85,5.711 38.83,5.614 38.818,5.584 38.801,5.542 38.745,5.459 38.718,5.432 38.691,5.404 38.608,5.349 38.578,5.337 38.536,5.32 38.439,5.3 38.361,5.3 38.264,5.32 38.234,5.332 38.192,5.349 38.109,5.404 38.082,5.432 38.055,5.459 37.999,5.542 37.987,5.572 37.97,5.614 37.95,5.711 37.95,5.731 37.946,5.75 37.946,6.475 37.946,7.25 37.95,7.269 37.95,7.289 37.97,7.386 37.982,7.416 37.999,7.458 38.055,7.541 38.082,7.568 38.109,7.595 38.192,7.651 38.222,7.663 38.264,7.68 38.361,7.7
  pour cut-out: 36.216,11.445 36.258,11.428 36.288,11.416 36.371,11.36 36.398,11.333 36.425,11.306 36.481,11.223 36.498,11.181 36.51,11.151 36.53,11.054 36.53,11.034 36.534,11.015 36.533,11.014 36.566,10.848 36.661,10.706 36.803,10.611 36.969,10.578 36.97,10.579 37.249,10.579 37.275,10.58 37.3,10.585 37.313,10.583 37.326,10.584 37.678,10.537 37.703,10.529 37.728,10.524 38.057,10.388 38.078,10.373 38.102,10.362 38.384,10.145 38.401,10.126 38.421,10.109 38.637,9.827 38.648,9.803 38.663,9.782 38.799,9.453 38.804,9.428 38.812,9.403 38.859,9.051 38.858,9.038 38.86,9.025 38.855,9 38.854,8.974 38.854,8.25 38.85,8.231 38.85,8.211 38.83,8.114 38.818,8.084 38.801,8.042 38.745,7.959 38.718,7.932 38.691,7.904 38.608,7.849 38.578,7.837 38.536,7.82 38.439,7.8 38.361,7.8 38.264,7.82 38.234,7.832 38.192,7.849 38.109,7.904 38.082,7.932 38.055,7.959 37.999,8.042 37.987,8.072 37.97,8.114 37.95,8.211 37.95,8.231 37.946,8.25 37.946,9.008 37.922,9.192 37.858,9.347 37.755,9.48 37.622,9.583 37.467,9.647 37.283,9.671 36.995,9.671 36.97,9.666 36.957,9.669 36.944,9.668 36.646,9.707 36.622,9.716 36.596,9.721 36.319,9.836 36.297,9.85 36.274,9.862 36.036,10.044 36.019,10.064 35.999,10.081 35.817,10.319 35.805,10.342 35.791,10.364 35.676,10.641 35.671,10.667 35.662,10.691 35.623,10.989 35.624,11.002 35.621,11.015 35.626,11.04 35.628,11.066 35.634,11.078 35.637,11.091 35.638,11.093 35.65,11.151 35.667,11.193 35.679,11.223 35.735,11.306 35.762,11.333 35.789,11.36 35.872,11.416 35.914,11.433 35.944,11.445 36.041,11.465 36.119,11.465
  pour cut-out: 36.939,16.975 37.036,16.955 37.066,16.943 37.108,16.926 37.191,16.87 37.218,16.843 37.245,16.816 37.301,16.733 37.313,16.703 37.33,16.661 37.35,16.564 37.35,16.544 37.354,16.525 37.354,14.975 37.35,14.956 37.35,14.936 37.33,14.839 37.318,14.809 37.301,14.767 37.245,14.684 37.218,14.657 37.191,14.63 37.108,14.574 37.078,14.562 37.036,14.545 36.939,14.525 36.861,14.525 36.764,14.545 36.734,14.557 36.692,14.574 36.609,14.63 36.582,14.657 36.555,14.684 36.499,14.767 36.487,14.797 36.47,14.839 36.45,14.936 36.45,14.956 36.446,14.975 36.446,16.525 36.45,16.544 36.45,16.564 36.47,16.661 36.482,16.691 36.499,16.733 36.555,16.816 36.582,16.843 36.609,16.87 36.692,16.926 36.722,16.938 36.764,16.955 36.861,16.975
  pour cut-out: 35,0.85 35,6 38.1,6 38.1,3.975 39.175,3.975 39.175,0.85
  pour cut-out: 35,0.85 35,0 40,0 40,6 38.7,6 38.7,5.8 38.9,5.8 38.9,4.55 39.675,4.55 39.675,0.35 35.5,0.35 35.5,0.85
GND:
  pour cut-out: 40,6 40,32.5 33,32.5 33,6
  pour cut-out: 35,0.85 35,6 38.1,6 38.1,3.975 39.175,3.975 39.175,0.85
  pour cut-out: 35,0.85 35,0 40,0 40,6 38.1,6 38.1,4.55 39.675,4.55 39.675,0.35 35.5,0.35 35.5,0.85
PWR:
  pour cut-out: 35,0.85 35,6 38.1,6 38.1,3.975 39.175,3.975 39.175,0.85
  pour cut-out: 35,0.85 35,0 40,0 40,6 38.1,6 38.1,4.55 39.675,4.55 39.675,0.35 35.5,0.35 35.5,0.85
Bottom Layer:
  pour cut-out: 35,0.85 35,6 38.1,6 38.1,3.975 39.175,3.975 39.175,0.85
  pour cut-out: 35,0.85 35,0 40,0 40,6 38.1,6 38.1,4.55 39.675,4.55 39.675,0.35 35.5,0.35 35.5,0.85

## Silkscreen, mask and mechanical layers (free items; w line width, h text height)
Top Overlay:
  text "BAT" at 5.367,18.762 h1.52
  text "CrgC" at 5.1,15.627 h1.52
  text "GND" at 5.188,12.762 h1.52
  text "GPS" at 32.216,2.58 h2 r90
  text "LIPSAR v2.0" at 30.491,2.561 h2 r90
Board:
  the board outline again, w0.05
Mechanical 15:
  lines w0.127: 1.9,13.5 3.1,13.5 3.1,14.4 1.9,14.4 ; 1.9,15.8 3.1,15.8 3.1,16.7 1.9,16.7 ; 1.9,18.1 3.1,18.1 3.1,19 1.9,19 ; 0,7.7 1.9,7.7 1.9,24.8 0,24.8 0,16.25 0,7.7

## Text inside footprints (layer, text, board x,y; h text height)
BT1: Top Overlay "+" at 21.675,23.775 h1
X4: Top Overlay "-" at 13.88,30.193 h1; Top Overlay "+" at 7.663,30.16 h1